# Altium PCB Multiplier_AD835.PcbDoc
Units mil, origin at the board's own origin, x right, y up, seen from the top; angles counter-clockwise.
Board outline 2100 x 1797 mil, 2 copper layers (Top Layer, Bottom Layer); 52 components, 29 nets, 168 pads, 143 vias.
Unrouted connection lines stored in the file: 30.
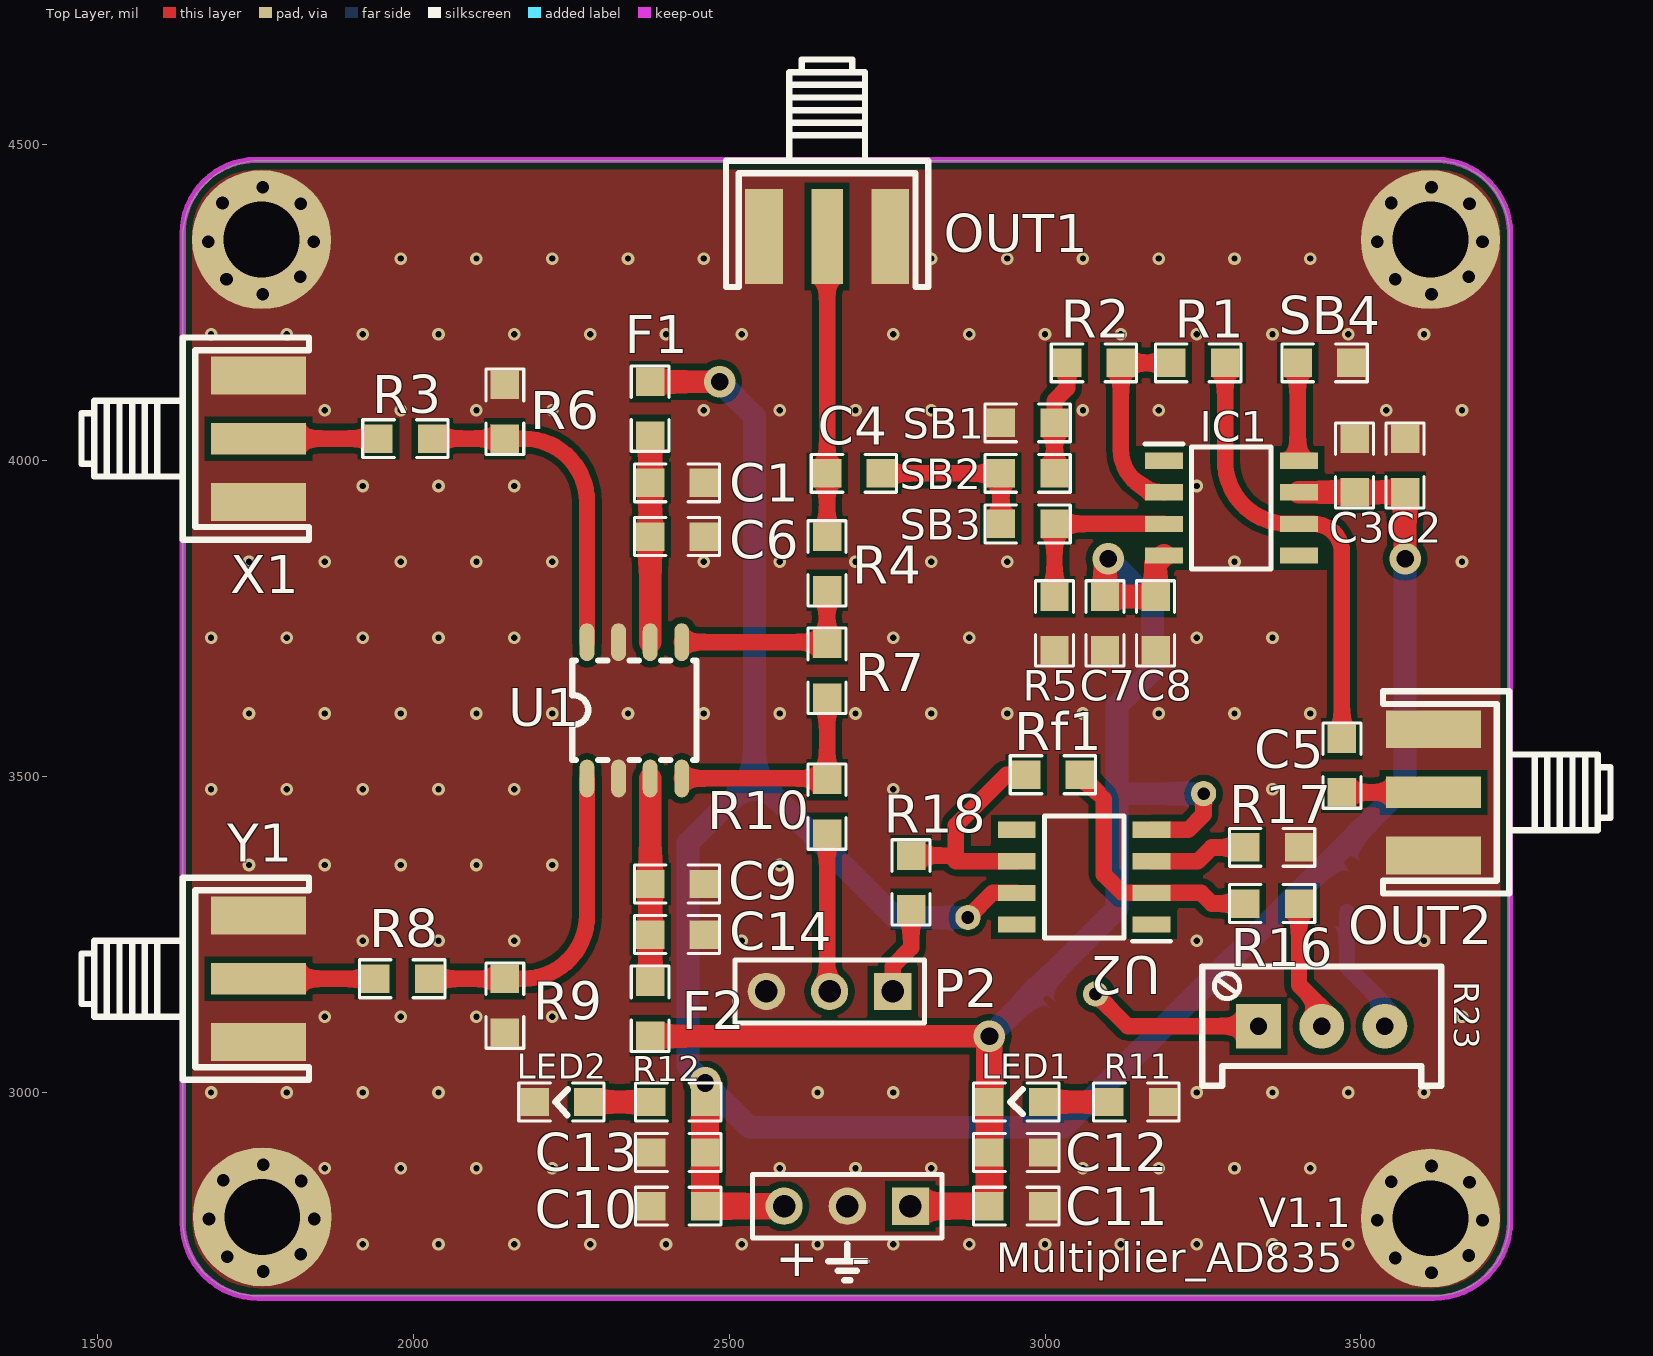
[diagram p0: Top Layer view]
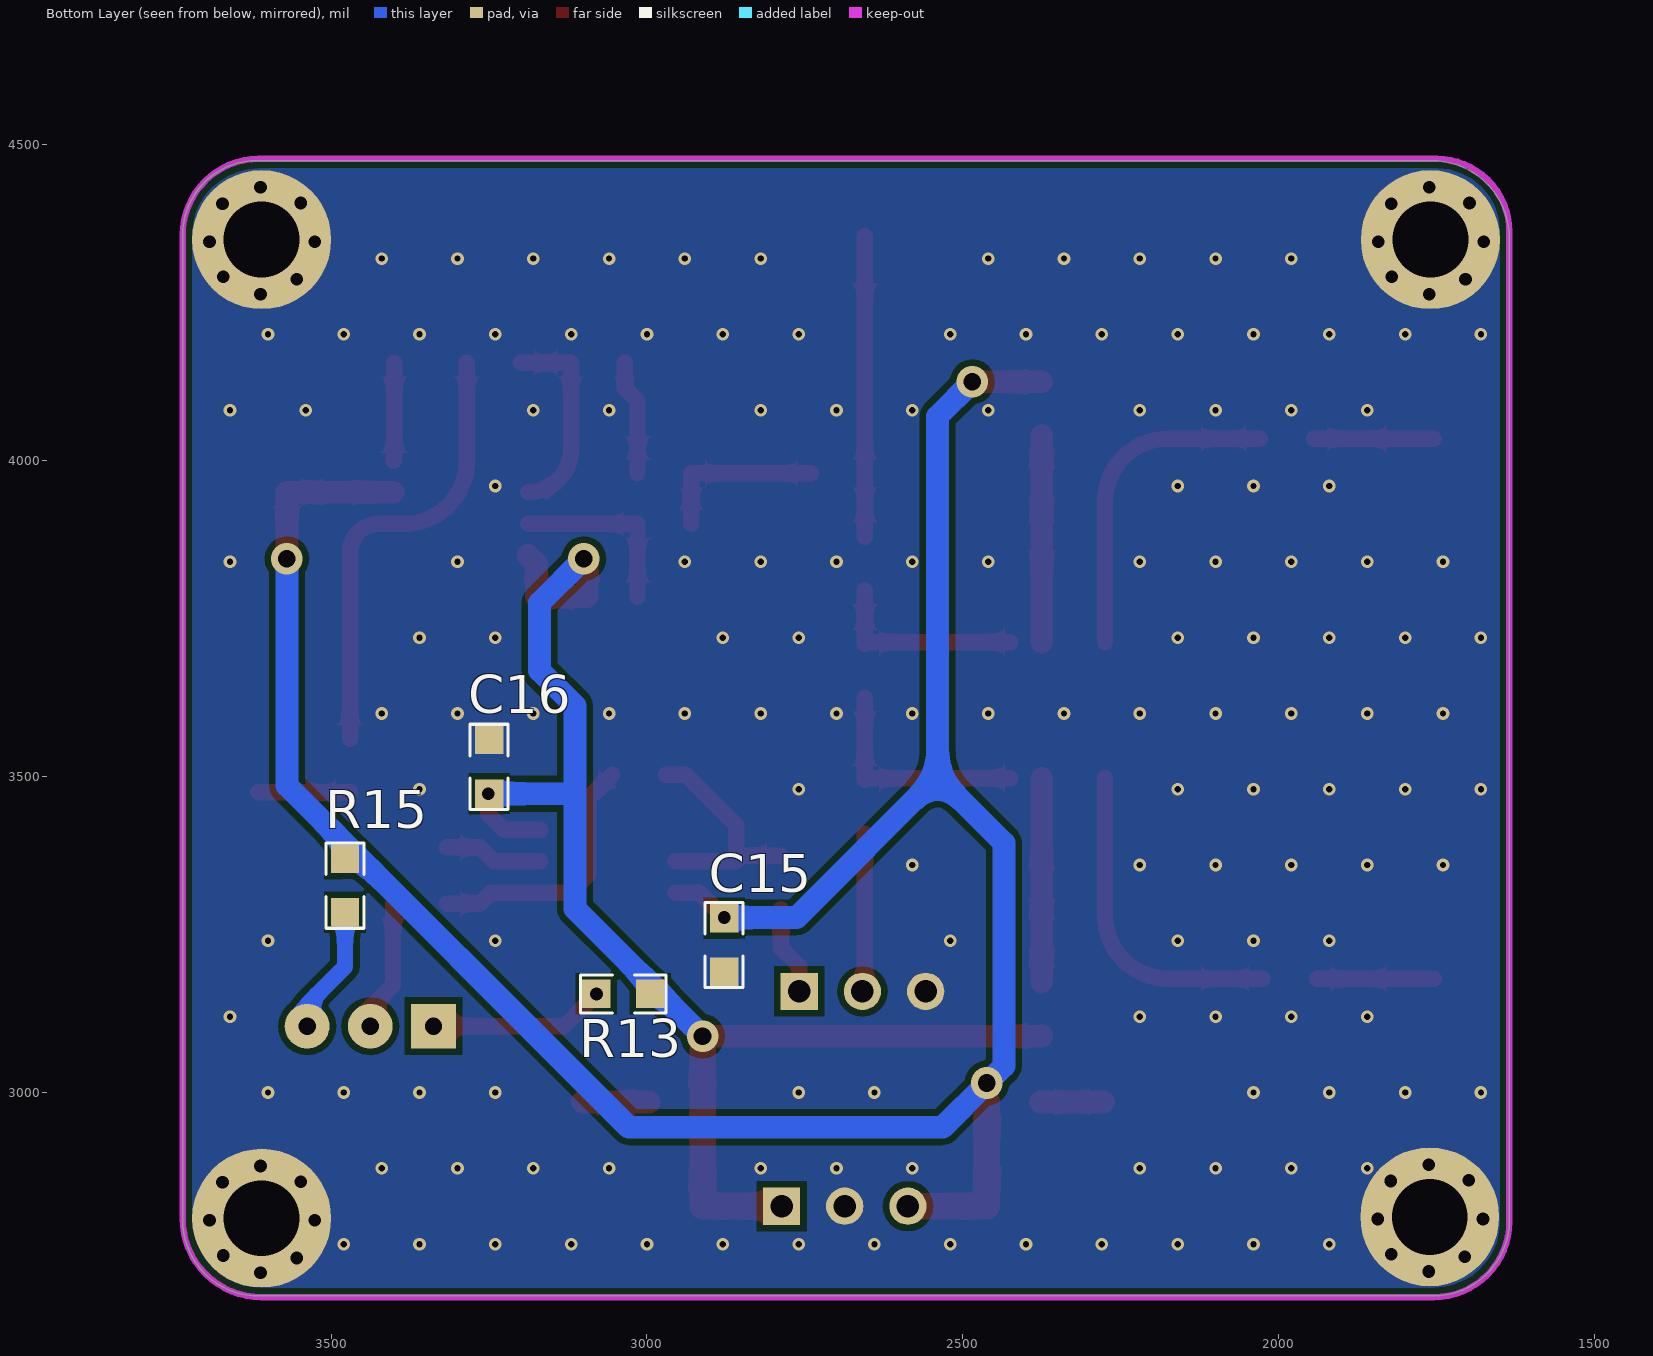
[diagram p1: Bottom Layer view, seen from below]

## Layer stack, top to bottom
Top Solder: solder mask 0.4, Solder Resist, Dk 3.5
Top Layer: signal copper 1.4
Dielectric 1: dielectric 12.6, FR-4, Dk 4.8
Bottom Layer: signal copper 1.4
Bottom Solder: solder mask 0.4, Solder Resist, Dk 3.5

## Board outline
1755,2678 3615,2678 ccw(c3615,2798) 3735,2798 3735,4357.57 ccw(c3617.57,4357.57) 3617.57,4475 1757.65,4475 ccw(c1757.65,4352.35) 1635,4352.35 1635,4215 1635,2798 ccw(c1755,2798)

## Design rules (kind name [scope] priority, off if disabled: settings)
Clearance [All] p1: gap=10 ignorepadtopadclearanceinfootprint=FALSE except(0: Arc-Hole Track-Hole SMDPad-Hole THPad-Hole Via-Hole Fill-Hole Poly-Hole Region-Hole Text-Hole)
PlaneConnect [All] p1: planeconnectstyle=Direct reliefexpansion=20 reliefentries=4 reliefconductorwidth=10 reliefairgap=10
PolygonConnect [All] p1: connectstyle=Direct reliefconductorwidth=10 reliefentries=4 polygonreliefangle="90 Angle" airgapwidth=10
RoutingVias [All] p1: holewidth=28 width=50 viastyle="Through Hole" minholewidth=28 minwidth=50 maxholewidth=28 maxwidth=50
SolderMaskExpansion [All] p1: expansion=4
Width [All] p1: maxlimit=55 minlimit=10 preferedwidth=10
29 further rules are at their usual default settings.

## Classes and differential pairs
component class Multiplier_AD835: "+  -" C1 C2 C3 C4 C5 C6 C7 C8 C9 C10 C11 C12 C13 C14 F1 F2 IC1 LED1 LED2 OUT1 OUT2 R1 R2 R3 R4 R5 R6 R7 R8 R9 R10 R11 R12 SB1 SB2 SB3 SB4 U1 X1 Y1

## Components (designator, comment, footprint, x,y, rotation, side; value= is the part's Value field where it differs from the comment)
"+  -" "Power" HDR1X3 2787,2820 r180 top (schematic designator P1)
C1 "Cap" 0805D 2455,3965 r180 top value=0.01u
C2 "Cap" 0805D 3570,4030 r270 top value=0.1u
C3 "Cap" 0805D 3490,3955 r90 top value=0.01u
C4 "Cap" 0805D 2660,3980 r0 top value=0.1u
C5 "Cap" 0805D 3470,3555 r270 top value=0.1u
C6 "Cap" 0805D 2380,3880 r0 top value=0.1u
C7 "Cap" 0805D 3095,3780 r270 top value=0.01u
C8 "Cap" 0805D 3175,3705 r90 top value=0.1u
C9 "Cap" 0805D 2455,3330 r180 top value=0.01u
C10 "Cap" 0805D 2382,2820 r0 top value=10u
C11 "Cap" 0805D 2992,2820 r180 top value=0.1u
C12 "Cap" 0805D 2992,2905 r180 top value=10u
C13 "Cap" 0805D 2382,2905 r0 top value=0.1u
C14 "Cap" 0805D 2380,3250 r0 top value=0.1u
C15 "0.1u" 0805D 2878,3196 r90 bottom
C16 "0.1u" 0805D 3250,3553 r270 bottom
F1 "MSMD200-8V 2A" 0805D 2375,4045 r90 top
F2 "MSMD200-8V 2A" 0805D 2375,3095 r90 top
IC1 "OPA695ID" SOIC127P600X175-8N 3295,3925 r0 top
LED1 "" 0805D 2992,2985 r180 top
LED2 "" 0805D 2272,2985 r180 top
OUT1 "SMA" SMA1 2755,4355 r270 top
OUT2 "SMA" SMA1 3615,3375 r180 top
P2 "Header 3" HDR1X3 2759,3160 r180 top
R1 "Res3" 0805D 3280,4155 r180 top value=2k
R2 "Res3" 0805D 3115,4155 r180 top value=2k
R3 "Res3" 0805D 1950,4035 r0 top value=200
R4 "Res3" 0805D 2655,3875 r270 top value=200
R5 "Res3" 0805D 3015,3705 r90 top value=2k
R6 "Res3" 0805D 2145,4115 r270 top
R7 "Res3" 0805D 2655,3630 r90 top value=2k
R8 "Res3" 0805D 1945,3180 r0 top value=200
R9 "Res3" 0805D 2145,3100 r90 top
R10 "Res3" 0805D 2655,3415 r90 top value=200
R11 "Res3" 0805D 3182,2985 r180 top value=1k
R12 "Res3" 0805D 2457,2985 r180 top value=1k
R13 "Res3" 0805D 3075,3156 r180 bottom value=75k
R15 "Res3" 0805D 3478,3365 r270 bottom value=75k
R16 "Res3" 0805D 3322,3299 r0 top value=75k
R17 "Res3" 0805D 3322,3388 r0 top value=75k
R18 "Res3" 0805D 2788,3295 r90 top value=75k
R23 "Comment" 3296W 3438,3105 r0 top
Rf1 "Res3" 0805D 2975,3503 r0 top value=75k
SB1 "Res3" 0805D 3010,4060 r180 top value=0
SB2 "Res3" 0805D 3010,3980 r180 top value=0
SB3 "Res3" 0805D 3010,3900 r180 top value=0
SB4 "Res3" 0805D 3480,4155 r180 top value=0
U1 "AD835ARZ" AD835arz 2350,3605 r90 top
U2 "OPA192ID" SOIC127P600X175-8N 3062,3341 r180 top
X1 "SMA" SMA1 1755,4135 r0 top
Y1 "SMA" SMA1 1755,3280 r0 top

## Footprints (in the part's own frame and the unit in brackets; to place one, negate y for a bottom-side part, rotate by r counter-clockwise, add the part's x,y. Pads: shape width x height; smd on the part's side, far side on the other; paste and mask are expansions set on the pad)
0805D [mil]
  rect 45x45 smd: 1(-5,0) 2(80,0)
  silkscreen extent -30,-30 105,30
3296W [mm] "Precise Multi-Winding Adjustable Resistor"
  rect 1.8x1.8 hole 0.7: 1(-2.54,0)
  round 1.8 hole 0.7: 2(2.54,0) ADJ(0,0)
  silkscreen extent -4.8,-2.4 4.8,2.4, body extent -4.75,-2.4 4.75,2.4, height 11.52
AD835arz [mm]
  oval 1.52x0.6 smd: 1(-2.74,1.905) 2(-2.74,0.635) 3(-2.74,-0.635) 4(-2.74,-1.905) 5(2.74,-1.905) 6(2.74,-0.635) 7(2.74,0.635) 8(2.74,1.905)
  silkscreen extent -2,-2.5 2,2.5
HDR1X3 [mm] "Connector; Header; 3 Position"
  rect 1.5x1.5 hole 0.9: 1(0,0)
  round 1.5 hole 0.9: 2(2.54,0) 3(5.08,0)
  silkscreen extent -1.27,-1.27 6.35,1.27
SMA1 [mil]
  rect 150x50 smd: 1(0,-100)
  rect 150x60 smd: 2(0,0) 2(0,-200)
  silkscreen extent -280,-260 80,60
SOIC127P600X175-8N [mm]
  rect 1.525x0.65 smd: 1(-2.712,1.905) 2(-2.712,0.635) 3(-2.712,-0.635) 4(-2.712,-1.905) 5(2.712,-1.905) 6(2.712,-0.635) 7(2.712,0.635) 8(2.712,1.905)
  silkscreen extent -3.47,-2.45 1.6,2.58, body extent -3,-2.45 3,2.45, height 1.75

## Part data
"+  -": library part "Header 3", "Header, 3-Pin", LatestRevisionDate=17-Jul-2002, LatestRevisionNote="Re-released for DXP Platform.", Publisher="Altium Limited"
C1 C2 C3 C4 C5 C6 C7 C8 C9 C10 C11 C12 C13 C14: "Capacitor", LatestRevisionDate=17-Jul-2002, LatestRevisionNote="Re-released for DXP Platform.", PackageDescription="Radial Cap, Thru-Hole; 2 Leads; 0.3 in Pin Spacing", PackageReference=RAD-0.3, Published=8-Jun-2000, Publisher="Altium Limited"
C15 C16: library part CAP_T
F1 F2: library part FU, "贴片保险丝", 学习资源=ww
IC1: "Integrated Circuit", Manufacturer_Name="Texas Instruments", Mouser Part Number=595-OPA695ID, Arrow Part Number=OPA695ID, Arrow Price/Stock=https://www.arrow.com/en/products/opa695id/texas-instruments, Datasheet Link=http://www.ti.com/lit/ds/symlink/opa695.pdf, Height=1.75mm, Manufacturer_Part_Number=OPA695ID, Mouser Price/Stock=https://www.mouser.co.uk/ProductDetail/Texas-Instruments/OPA695ID/?qs=wgAEGBTxy7n%252BTWPkkfsFRg%3D%3D
LED1 LED2: library part LED-SMD, "贴片LED", 学习资源=ww
OUT1 OUT2 X1 Y1: library part BNC, "BNC Elbow Connector", LatestRevisionDate=17-Jul-2002, LatestRevisionNote="Re-released for DXP Platform.", Publisher="Altium Limited"
P2: "Header, 3-Pin", LatestRevisionDate=17-Jul-2002, LatestRevisionNote="Re-released for DXP Platform.", Publisher="Altium Limited"
R1 R2 R3 R4 R5 R6 R7 R8 R9 R10 R11 R12 R13 R15 R16 R17 R18 Rf1 SB1 SB2 SB3 SB4: "Resistor", LatestRevisionDate=29-May-2009, LatestRevisionNote="IPC-7351 Footprint Added.", PackageDescription="Chip Resistor", PackageReference=J1-0603, Published=8-Jun-2000, Publisher="Altium Limited"
R23: library part "Res Tap", "Tapped Resistor"
U1: BOM_JLCPCB Part Class="Extended Part", BOM_Manufacturer=ADI, BOM_Manufacturer Part=AD835ARZ, BOM_Supplier=LCSC, BOM_Supplier Part=C26332, spicePre=X, spiceSymbolName=AD835ARZ
U2: "Undefined or Miscellaneous", Manufacturer_Name="Texas Instruments", Mouser Part Number=595-OPA192ID, Arrow Part Number=OPA192ID, Arrow Price/Stock=https://www.arrow.com/en/products/opa192id/texas-instruments?region=nac, Datasheet Link=http://www.ti.com/lit/ds/symlink/opa192.pdf, Height=1.75mm, Manufacturer_Part_Number=OPA192ID, Mouser Price/Stock=https://www.mouser.co.uk/ProductDetail/Texas-Instruments/OPA192ID?qs=wrT8kFYR779tQjMORwdPeQ%3D%3D

## Free pads (board coordinates)
  round 220 hole 120: 0(1760,4350) 0(1761,2803) 0(3610,2801) 0(3610,4350)
  round 40 hole 20: 8(1675.67,4346.72) 8(1676.67,2799.72) 8(1698,4408) 8(1699,2861) 8(1704.31,4287) 8(1705.31,2740) 8(1761.67,4263.72) 8(1761.67,4432.72) 8(1762.67,2716.72) 8(1762.67,2885.72) 8(1821,4291) 8(1822,2744) 8(1822,4407) 8(1823,2860) 8(1842.56,4346.72) 8(1843.56,2799.72) 8(2878,3277) 8(3080,3156) 8(3251,3473) 8(3525.67,2797.72) 8(3525.67,4346.72) 8(3548,2859) 8(3548,4408) 8(3554.31,2738) 8(3554.31,4287) 8(3611.67,2714.72) 8(3611.67,2883.72) 8(3611.67,4263.72) 8(3611.67,4432.72) 8(3671,2742) 8(3671,4291) 8(3672,2858) 8(3672,4407) 8(3692.56,2797.72) 8(3692.56,4346.72)

## Via types
v1: diameter 20, hole 10, Top Layer to Bottom Layer, 138 vias
v2: diameter 50, hole 28, Top Layer to Bottom Layer, 5 vias

## Nets (pads, with @x,y where several pads share a name; then routed paths per layer and width w, separated by ;. In a path a pad name is that pad's centre, name@x,y a point inside that pad or via, vN(x,y) a via of type N, cw(c..) or ccw(c..) an arc to the next point about the centre after c; other vN are vias at no path point)
GND: "+  -.2" C1.1 C2.1 C3.2 C6.2 C7.2 C8.1 C9.1 C10.1 C11.1 C12.1 C13.1 C14.2 C15.1 C16.1 LED2.2 OUT1.2 OUT2.2 P2.3 pad.0 pad.8@1675.67,4346.72 pad.8@1676.67,2799.72 pad.8@1698,4408 pad.8@1699,2861 pad.8@1704.31,4287 pad.8@1705.31,2740 pad.8@1761.67,4263.72 pad.8@1761.67,4432.72 pad.8@1762.67,2716.72 pad.8@1762.67,2885.72 pad.8@1821,4291 pad.8@1822,2744 pad.8@1822,4407 pad.8@1823,2860 pad.8@1842.56,4346.72 pad.8@1843.56,2799.72 pad.8@3525.67,2797.72 pad.8@3525.67,4346.72 pad.8@3548,2859 pad.8@3548,4408 pad.8@3554.31,2738 pad.8@3554.31,4287 pad.8@3611.67,2714.72 pad.8@3611.67,2883.72 pad.8@3611.67,4263.72 pad.8@3611.67,4432.72 pad.8@3671,2742 pad.8@3671,4291 pad.8@3672,2858 pad.8@3672,4407 pad.8@3692.56,2797.72 pad.8@3692.56,4346.72 R5.1 R6.1 R9.1 R11.1 R17.2 SB1.2 SB4.1 U1.2 U1.7 X1.2 Y1.2
  other v1: 1920,2760 2040,2760 2160,2760 2280,2760 2400,2760 2520,2760 2640,2760 2760,2760 2880,2760 3000,2760 3120,2760 3240,2760 3360,2760 3480,2760 1860,2880 1980,2880 2100,2880 2220,2880 2580,2880 2700,2880 2820,2880 3060,2880 3180,2880 3300,2880 3420,2880 1680,3000 1800,3000 1920,3000 2040,3000 2640,3000 2760,3000 3240,3000 3360,3000 3480,3000 3600,3000 1860,3120 1980,3120 2100,3120 2220,3120 3660,3120 1920,3240 2040,3240 2160,3240 2520,3240 3240,3240 3600,3240 1740,3360 1860,3360 1980,3360 2100,3360 2220,3360 2580,3360 1680,3480 1800,3480 1920,3480 2040,3480 2160,3480 2760,3480 3360,3480 1740,3600 1860,3600 1980,3600 2100,3600 2220,3600 2340,3600 2460,3600 2580,3600 2700,3600 2820,3600 2940,3600 3060,3600 3180,3600 3300,3600 3420,3600 1680,3720 1800,3720 1920,3720 2040,3720 2160,3720 2760,3720 2880,3720 3240,3720 3360,3720 1740,3840 1860,3840 1980,3840 2100,3840 2220,3840 2460,3840 2580,3840 2700,3840 2820,3840 2940,3840 3300,3840 3660,3840 1920,3960 2040,3960 2160,3960 3240,3960 1860,4080 1980,4080 2100,4080 2220,4080 2460,4080 2580,4080 2700,4080 2820,4080 3060,4080 3180,4080 3540,4080 3660,4080 1680,4200 1800,4200 1920,4200 2040,4200 2160,4200 2280,4200 2400,4200 2520,4200 2760,4200 2880,4200 3000,4200 3120,4200 3240,4200 3360,4200 3480,4200 3600,4200 1980,4320 2100,4320 2220,4320 2340,4320 2460,4320 2820,4320 2940,4320 3060,4320 3180,4320 3300,4320 3420,4320
NetC1_2: C1.2 C6.1 F1.1 U1.6 | length 327.1
  Top Layer w36: U1.6 C6.1 C1.2 F1.1
NetC4_1: C4.1 OUT1.1 R4.1 | length 475
  Top Layer w26: R4.1 C4.1 OUT1.1
NetC4_2: C4.2 SB2.2 SB3.2 | length 270
  Top Layer w26: C4.2 SB2.2 SB3.2
NetC5_1: C5.1 IC1.6 R1.1 | length 717.8
  Top Layer w26: R1.1 3285,4000 ccw(c3385,4000) 3385,3900 IC1.6 3425,3900 cw(c3425,3855) 3470,3855 C5.1
NetC5_2: C5.2 OUT2.1 | length 145
  Top Layer w26: C5.2 OUT2.1
NetC9_2: C9.2 C14.1 F2.2 U1.3 | length 322.1
  Top Layer w36: F2.2 C14.1 C9.2 U1.3
NetIC1_2: IC1.2 R1.2 R2.1 | length 323.9
  Top Layer w26: IC1.2 cw(c3188.23,4018.23) 3120,4018.23 R2.1 R1.2
NetIC1_3: IC1.3 R5.2 SB3.1 | length 288.2
  Top Layer w26: R5.2 SB3.1 IC1.3
NetIC1_8: IC1.8 SB4.2 | length 155.7
  Top Layer w26: SB4.2 3400,4001.77 IC1.8
NetLED1_1: LED1.1 R11.2 | length 105
  Top Layer w36: LED1.1 R11.2
NetLED2_1: LED2.1 R12.2 | length 100
  Top Layer w36: LED2.1 R12.2
NetR2_2: R2.2 SB1.1 SB2.1 | length 183.3
  Top Layer w26: SB2.1 SB1.1 3015,4095 3035,4115 R2.2
NetR3_1: R3.1 X1.1 | length 190
  Top Layer w26: X1.1 R3.1
NetR3_2: R3.2 R6.2 U1.8 | length 524.2
  Top Layer w26: R3.2 R6.2 2175,4035 cw(c2175,3935) 2275,3935 U1.8
NetR4_2: R4.2 R7.2 U1.5 | length 316.6
  Top Layer w26: U1.5 2652.12,3712.88 cw(c2652.12,3710) R7.2 R4.2
NetR7_1: R7.1 R10.2 U1.4 | length 361.2
  Top Layer w26: U1.4 2652.87,3497.13 cw(c2652.87,3495) R10.2 R7.1
NetR8_1: R8.1 Y1.1 | length 185
  Top Layer w26: Y1.1 R8.1
NetR8_2: R8.2 R9.2 U1.1 | length 524.2
  Top Layer w26: R8.2 R9.2 2175,3180 ccw(c2175,3280) 2275,3280 U1.1
NetR13_1: pad.8@3080,3156 R13.1 R23.1 | length 279.1
  Top Layer w26: pad.8@3080,3156 3131,3105 R23.1
NetR14_1: R15.2 R23.2 | length 204.9
  Bottom Layer w26: R15.2 3478,3199 3538,3139 R23.2
NetR14_3: R16.2 R23.ADJ | length 208.9
  Top Layer w26: R16.2 3402,3170 3438,3134 R23.ADJ
NetR16_1: R16.1 Rf1.2 U2.2 | length 416.8
  Top Layer w26: Rf1.2 3093,3465 3093,3345 3122,3316 U2.2 3247,3316 3264,3299 R16.1
NetR17_1: R17.1 U2.3 | length 157.3
  Top Layer w26: U2.3 3242,3366 3264,3388 R17.1
NetR18_2: R18.2 Rf1.1 U2.6 | length 372.1
  Top Layer w26: R18.2 2850,3375 2859,3366 ; U2.6 2859,3366 ; Rf1.1 2939,3503 2859,3423 2859,3366
V+: "+  -.3" C2.2 C3.1 C10.2 C13.2 C15.2 F1.2 IC1.7 pad.8@2878,3277 R12.1 R15.1 U2.7 | length 4134.5
  Top Layer w26: pad.8@2878,3277 2917,3316 U2.7
  Top Layer w36: F1.2 v2(2485,4125) ; R12.1 v2(2462,3015) ; IC1.7 C3.1 C2.2 v2(3570,3845)
  Top Layer w42: R12.1 C13.2 C10.2 2587,2820
  Bottom Layer w36: v2(2485,4125) 2540,4070 2540,3500 ; pad.8@2878,3277 2763,3277 2540,3500 ; v2(3570,3845) 3570,3486 3029,2945 2532,2945 v2(2462,3015) 2435,3042 2435,3395 2540,3500
V-: "+  -.1" C7.1 C8.2 C11.2 C12.2 C16.2 F2.1 IC1.4 LED1.2 pad.8@3251,3473 R13.2 U2.4 | length 2298.8
  Top Layer w26: U2.4 3227,3416 3251,3440 pad.8@3251,3473
  Top Layer w36: F2.1 2376,3089 v2(2912,3089) ; v2(3100,3845) 3095,3840 C7.1 C8.2 3175,3836.77 IC1.4
  Top Layer w42: 2787,2820 C11.2 C12.2 LED1.2 v2(2912,3089)
  Bottom Layer w36: v2(2912,3089) 3114,3291 3114,3471 ; v2(3100,3845) 3170,3775 3170,3668 3114,3612 3114,3471 ; pad.8@3251,3473 C16.2 3116,3473 3114,3471
Z: P2.2 R10.1 | length 251.7
  Top Layer w26: R10.1 2655,3164 P2.2
Z_V: P2.1 R18.1 | length 142
  Top Layer w26: P2.1 2759,3200 2788,3229 R18.1
pads on no net: IC1.1 IC1.5 U2.1 U2.5 U2.8

## Polygon pours and split planes (outlines as drawn)
GND on Top Layer "Top Layer-No Net" (solid, remove dead copper, pour order 9): 1755,2678 3615,2678 ccw(c3615,2798) 3735,2798 3735,4357.57 ccw(c3617.57,4357.57) 3617.57,4475 1757.65,4475 ccw(c1757.65,4352.35) 1635,4352.35 1635,4215 1635,2798 ccw(c1755,2798)
GND on Bottom Layer "Top Layer-No Net1" (solid, remove dead copper, pour order 10): 1755,2678 3615,2678 ccw(c3615,2798) 3735,2798 3735,4357.57 ccw(c3617.57,4357.57) 3617.57,4475 1757.65,4475 ccw(c1757.65,4352.35) 1635,4352.35 1635,4215 1635,2798 ccw(c1755,2798)

## Keep-outs
Top Layer:
  lines w10: 1635,2794.83 ccw(c1754.83,2794.83) 1754.83,2675 3615.04,2675 ccw(c3615.04,2795.96) 3736,2795.96 3736,4359.94 ccw(c3619.94,4359.94) 3619.94,4476 1769,4476 1751.06,4476 ccw(c1751.06,4359.94) 1635,4359.94 1635,2794.83
Bottom Layer:
  lines w10: 1635,2795.48 ccw(c1754.48,2795.48) 1754.48,2676 3610.5,2676 ccw(c3610.5,2800.5) 3735,2800.5 3735,4357.4 ccw(c3614.4,4357.4) 3614.4,4478 1750,4478 ccw(c1750,4363) 1635,4363 1635,2795.48

## Silkscreen, mask and mechanical layers (free items; w line width, h text height)
Top Overlay:
  lines w10: 2244,2964 2225,2985 2245,3005 ; 2657,2733 2717,2733 ; 2672,2718 2702,2718 ; 2682,2703 2692,2703 ; 2687,2738 2687,2760 ; 2965,2966 2945,2985 2965,3005
  text "V1.1" at 3338,2771 h80
  text "Multiplier_AD835" at 2923,2700 h80
Top Solder:
  text "这里是供电" at 2515,2941 h80
  text "→" at 2579,2932 h60 r270
Bottom Solder:
  text "Designed By" at 2357,2790 h80
  text "NoFelReg" at 2224,2704 h80
Mechanical 1:
  lines w10: 1635,2798 ccw(c1755,2798) 1755,2678 1762.67,2678 3611.67,2678 3615,2678 ccw(c3615,2798) 3735,2798 3735,4357.57 ccw(c3617.57,4357.57) 3617.57,4475 1757.65,4475 ccw(c1757.65,4352.35) 1635,4352.35 1635,4215 1635,2798